# Altium PCB PCB.PcbDoc
Units mm, origin at the board's own origin, x right, y up, seen from the top; angles counter-clockwise.
Board outline 32.5 x 63 mm, 4 copper layers (Top Layer, Layer 1, Layer 2, Bottom Layer), stack 0.603 mm thick; 13 components, 20 nets, 68 pads, 176 vias.
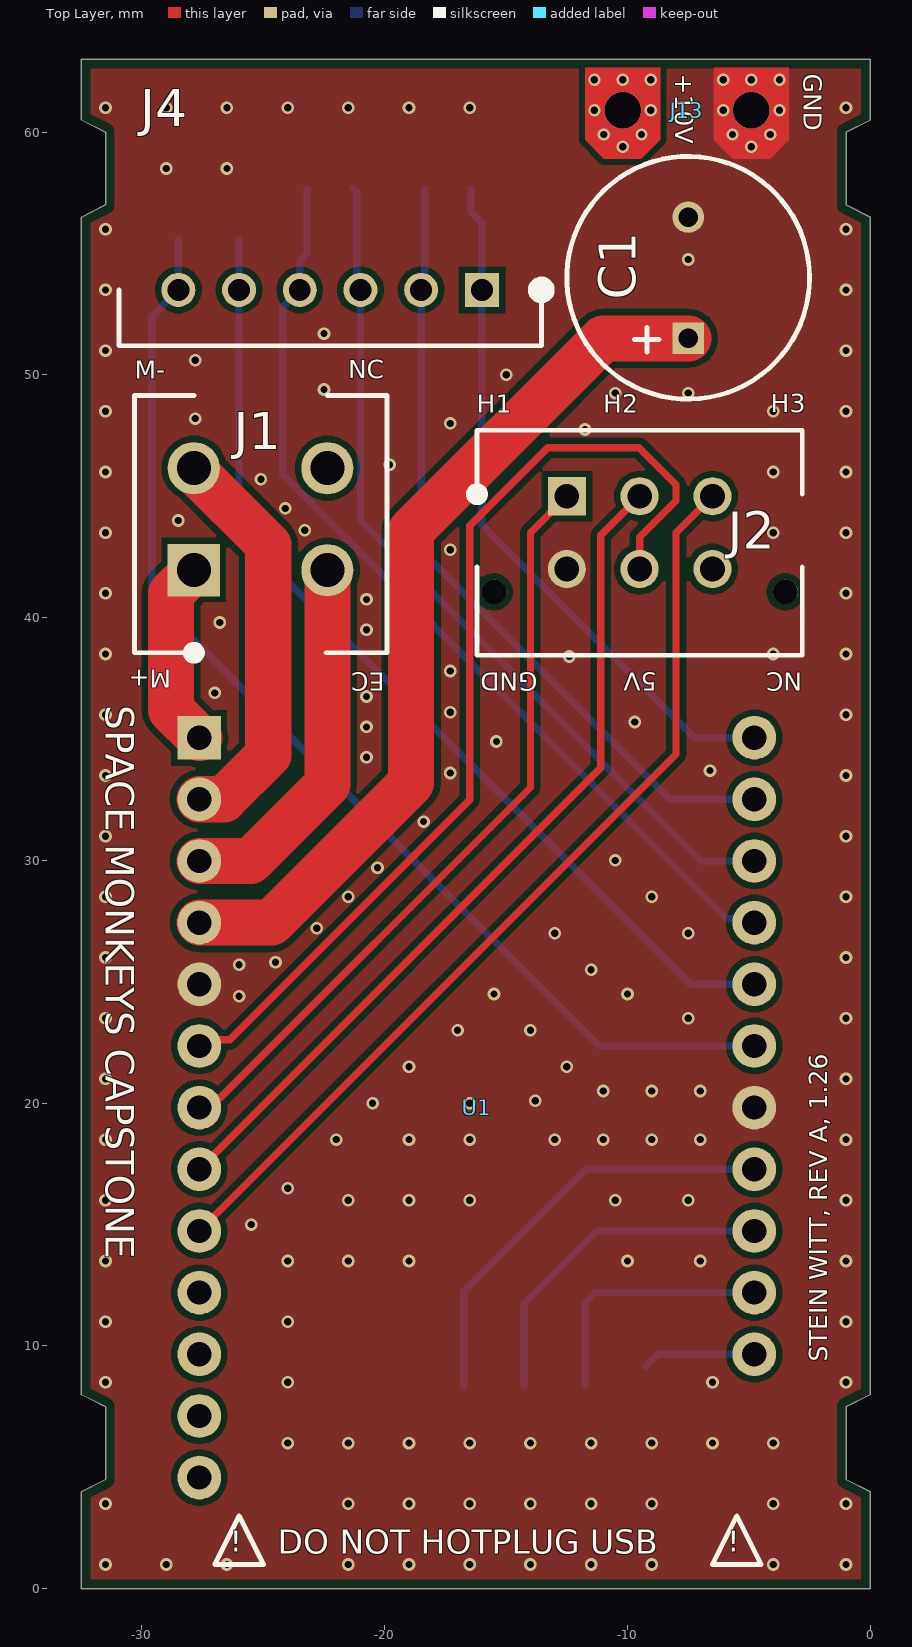
[diagram p0: Top Layer view]
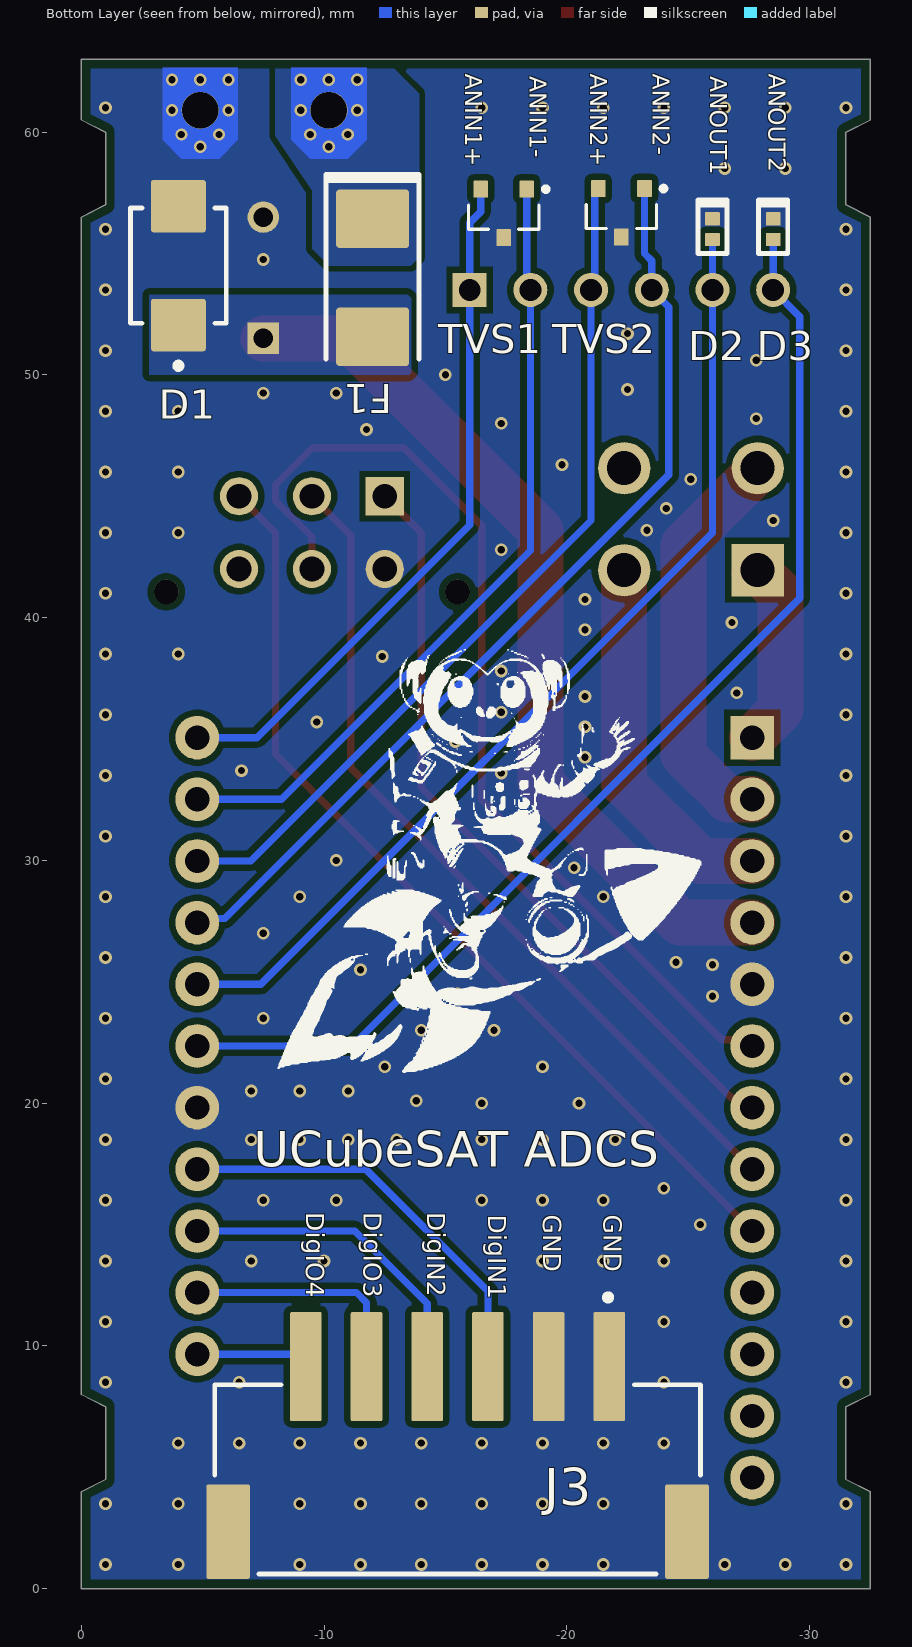
[diagram p1: Bottom Layer view, seen from below]
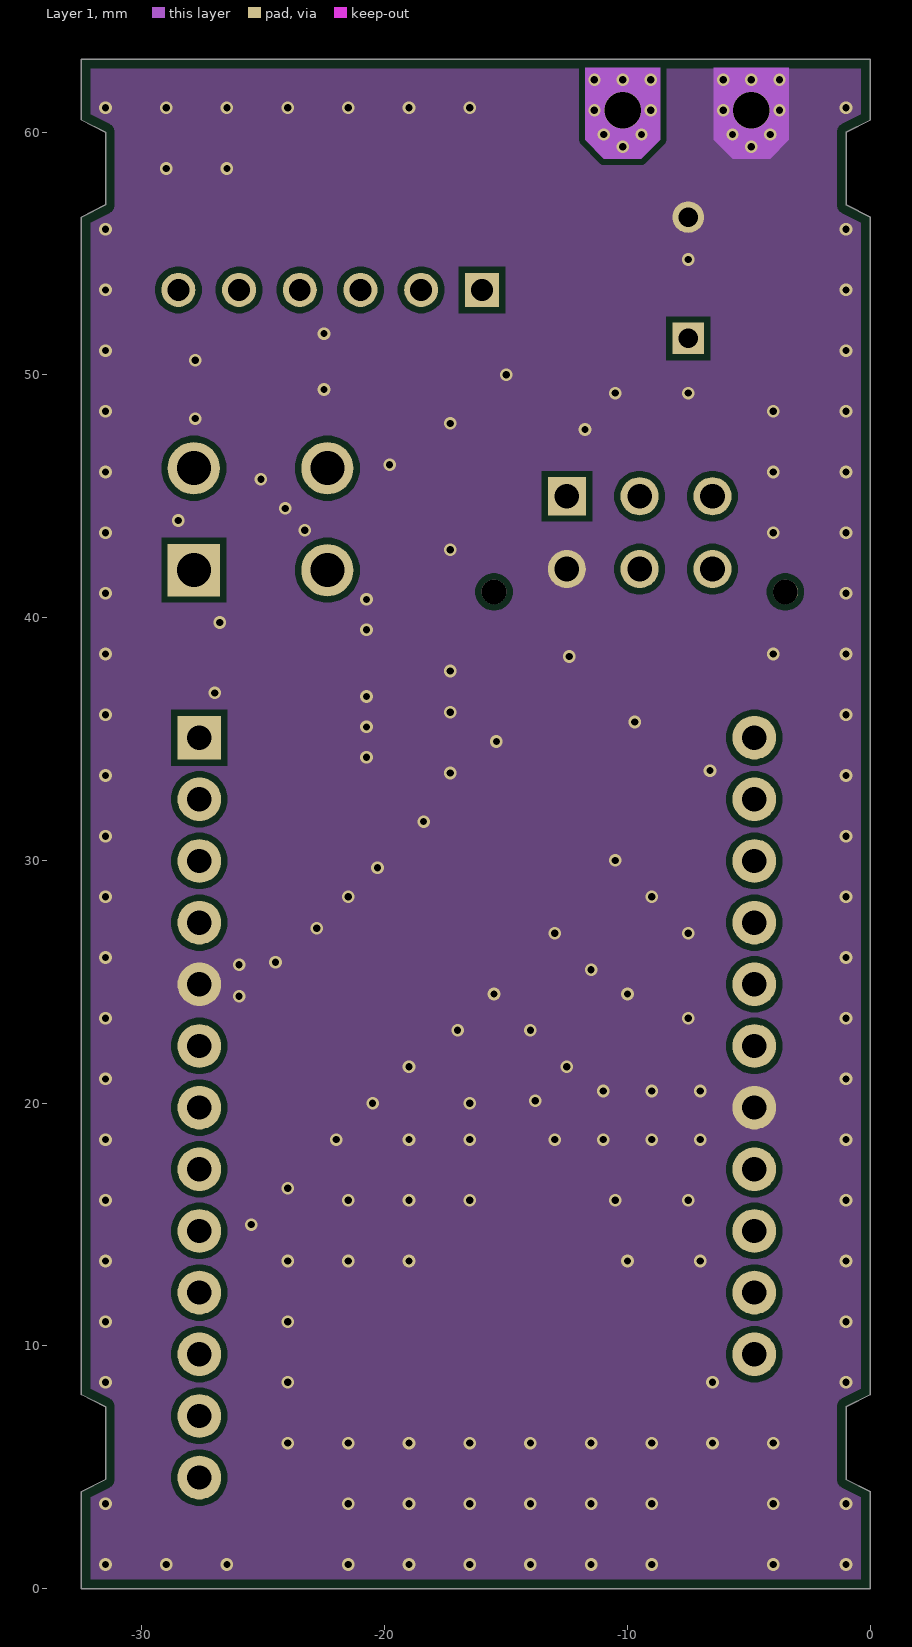
[diagram p2: Layer 1]
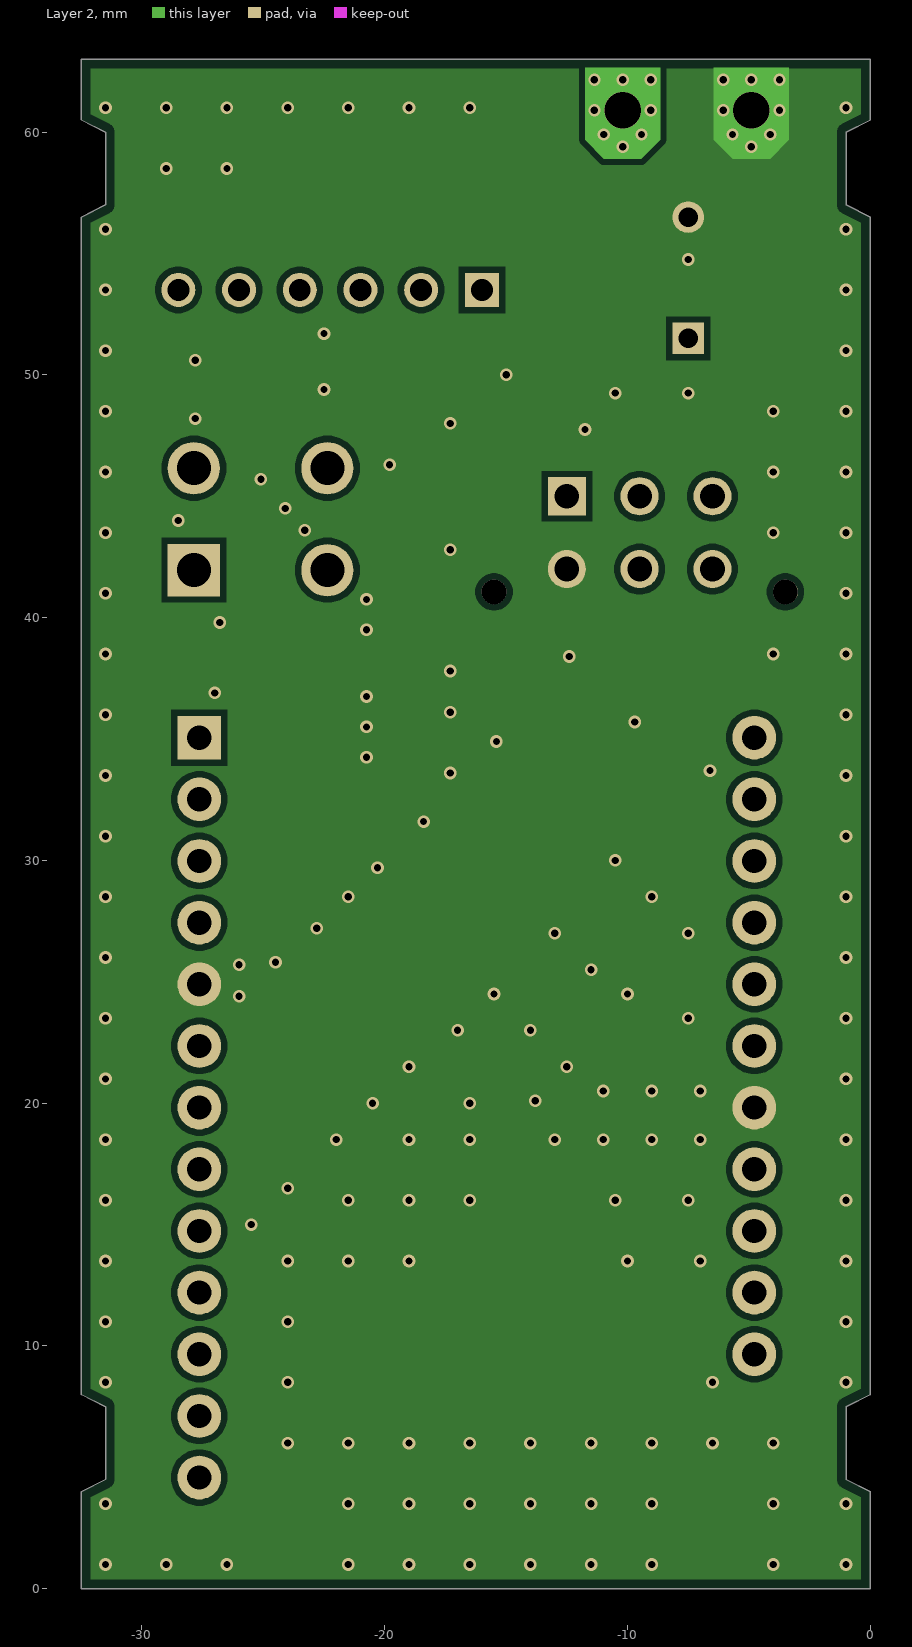
[diagram p3: Layer 2]
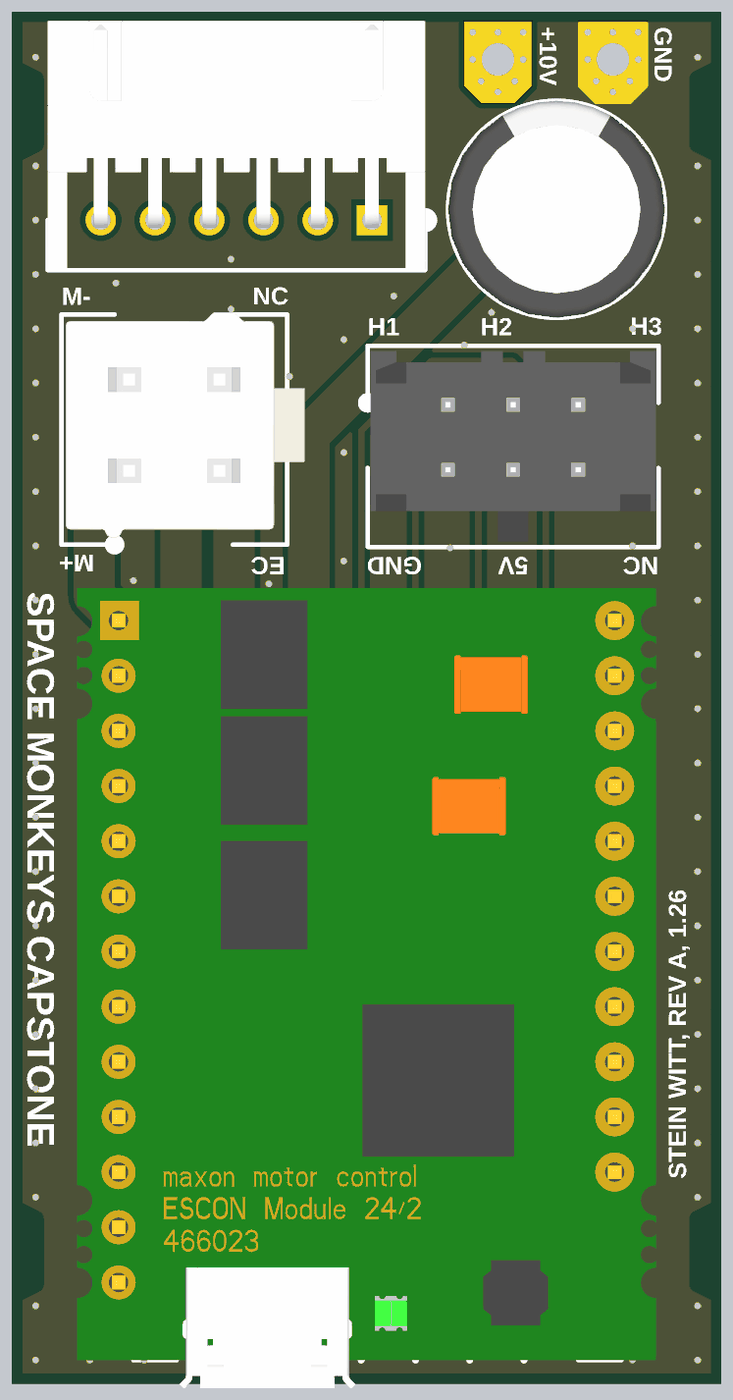
[diagram p4: 3D render of the assembled board from above, using the file's embedded part models]
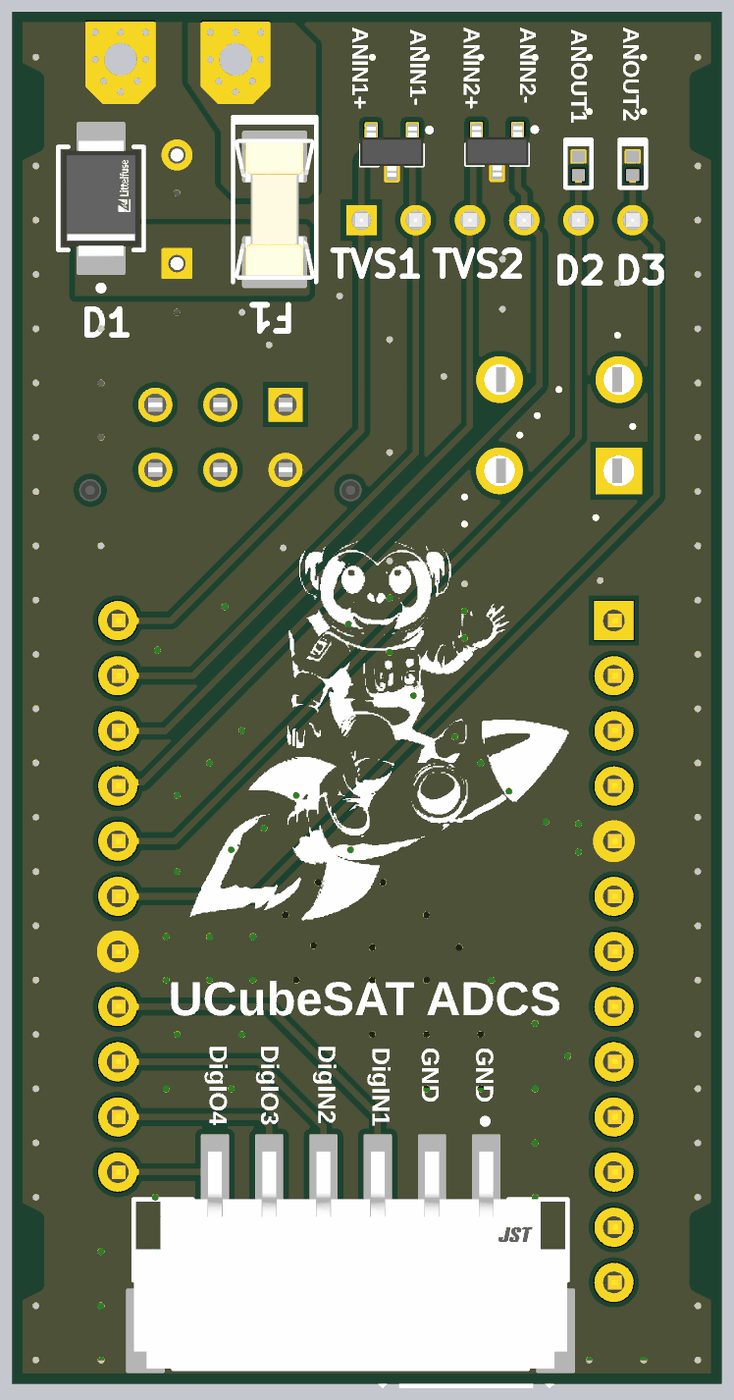
[diagram p5: 3D render of the assembled board from below, using the file's embedded part models]

## Layer stack, top to bottom
Top Solder: solder mask 0.0102, Solder Resist, Dk 3.5
Top Layer: signal copper 0.0356
Dielectric 2: prepreg 0.0711, PP-006, Dk 4.1
Layer 1: signal copper 0.035
Dielectric 1: dielectric 0.32, FR-4, Dk 4.8
Layer 2: signal copper 0.035
Dielectric 3: prepreg 0.0711, PP-006, Dk 4.1
Bottom Layer: signal copper 0.0356
Bottom Solder: solder mask 0.0102, Solder Resist, Dk 3.5

## Board outline
-32.5,0 -32.5,4 -31.5,4.5 -31.5,7.5 -32.5,8 -32.5,56.5 -31.5,57 -31.5,60 -32.5,60.5 -32.5,63 0,63 0,60.5 -1,60 -1,57 0,56.5 0,8 -1,7.5 -1,4.5 0,4 0,0

## Design rules (kind name [scope] priority, off if disabled: settings)
BoardOutlineClearance [All] p1: gap=0.381 ignorepadtopadclearanceinfootprint=FALSE
Clearance "Clearance Polygons" [InPolygon] p1: gap=0.254 ignorepadtopadclearanceinfootprint=FALSE
Clearance [All] p2: gap=0.127 ignorepadtopadclearanceinfootprint=FALSE
ComponentClearance "HM-TRP & UFL" [InComponent('X1') vs InComponent('U1')] p1: gap=0 collisioncheckmode=3 verticalgap=0 showdistances=FALSE
ComponentClearance [All] p2: gap=0.025 collisioncheckmode=3 verticalgap=0.025 showdistances=FALSE
DiffPairsRouting [All] p1: maxlimit=10 minlimit=0.127 mostfreqgap=0.203 toplayer_minwidth=0.127 toplayer_maxwidth=0.381 toplayer_prefwidth=0.203 midlayer1_minwidth=0.127 midlayer1_maxwidth=0.381 midlayer1_prefwidth=0.203 midlayer2_minwidth=0.127 midlayer2_maxwidth=0.381 midlayer2_prefwidth=0.203 bottomlayer_minwidth=0.127 bottomlayer_maxwidth=0.381 bottomlayer_prefwidth=0.203 maxuncoupledlength=12.7
HoleSize [All] p1: absolutevalues=TRUE maxlimit=6.731 minlimit=0.254 maxpercent=80.000 minpercent=20.000
HoleToHoleClearance [All] p1: gap=0.254 allowstackedmicrovias=FALSE
MinimumAnnularRing [All] p1: minimumring=0.102
MinimumSolderMaskSliver [All] p1: minsoldermaskwidth=0
PlaneClearance [All] p1: clearance=0.254
PlaneConnect [All] p1: planeconnectstyle=Relief reliefexpansion=0.102 reliefentries=4 reliefconductorwidth=0.152 reliefairgap=0.152
PolygonConnect "Via connect style" [isVia] p1: connectstyle=Direct reliefconductorwidth=0.254 reliefentries=4 polygonreliefangle="90 Angle" airgapwidth=0.254
PolygonConnect [All] p2: connectstyle=Direct reliefconductorwidth=0.254 reliefentries=4 polygonreliefangle="90 Angle" airgapwidth=0.152
RoutingCorners [All] p1: cornerstyle=45-Degree minsetback=1.25 maxsetback=1.25
RoutingVias [All] p1: holewidth=0.305 width=0.559 viastyle="Through Hole" minholewidth=0.254 minwidth=0.457 maxholewidth=2.54 maxwidth=2.896
SilkToSilkClearance [All] p1: silktosilkclearance=0
SilkToSolderMaskClearance [IsPad] p1: minsilkscreentomaskgap=0.127 clearancetoexposedcopper=TRUE
SolderMaskExpansion [All] p1: expansion=0.064 istentingtop=FALSE
SupplyNets "Schematic Supply Nets_4" [InNet('+10V')] p1: voltage=0.000
SupplyNets "Schematic Supply Nets_3" [InNet('GND')] p2: voltage=0.000
SupplyNets "Schematic Supply Nets" [InNet('+VCC_M1')] p3: voltage=0.000
Width GND [InNet('GND')] p1: maxlimit=0.762 minlimit=0.254 preferedwidth=0.508
Width Power [InNetClass('Power')] p2: maxlimit=1.016 minlimit=0.508 preferedwidth=0.762
Width 3V3 [InNetClass('3V3')] p3: maxlimit=0.762 minlimit=0.254 preferedwidth=0.508
Width [All] p4: maxlimit=10.16 minlimit=0.152 preferedwidth=0.203
20 further rules are at their usual default settings.

## Components (designator, comment, footprint, x,y, rotation, side; value= is the part's Value field where it differs from the comment)
C1 "EEU-FR1J121" CAP_THT_RAD_5MM -7.5,51.5 r90 top
D1 "SMBJ33A" "DO-214AA, SMB" -4,54.5 r90 bottom
D2 "CDDFN2-T3.3B" D_0402 -26,56 r270 bottom
D3 "CDDFN2-T3.3B" D_0402 -28.5,56 r270 bottom
F1 "0157004.DR" NANO2 -12,54 r270 bottom
J1 "0039281043" "4.20MM DUAL ROW 4 CIRCUIT CONN" -25.313,44.054 r90 top
J2 "0430450627" "3.00MM DUAL ROW 6 CIRCUIT CONN" -9.5,43.085 r180 top
J3 "S6B-XH-SM4-TB(LF)(SN)" S6B-XH-SM4-TB -15.5,4.5 r180 bottom locked
J4 "S6B-XH-A (LF)(SN)" JST-XH-6PIN_RA -22.25,56.95 r0 top
J13 "POWER_CONN" POWER -10.2,60.9 r0 top
TVS1 "PESD1CAN,215" SOT23 -17.4,56.65 r270 bottom
TVS2 "PESD1CAN,215" SOT23 -22.25,56.673 r270 bottom
U1 "ESCON24.2" ESCON24.2 -4.775,9.658 r90 top

## Footprints (in the part's own frame and the unit in brackets; to place one, negate y for a bottom-side part, rotate by r counter-clockwise, add the part's x,y. Pads: shape width x height; smd on the part's side, far side on the other; paste and mask are expansions set on the pad)
"3.00MM DUAL ROW 6 CIRCUIT CONN" [mm]
  rect 1.57x1.57 hole 1.02 paste-2539.97 mask+0: 1(3,-1.915)
  round 1.57 hole 1.02 paste-2539.97 mask+0: 2(0,-1.915) 3(-3,-1.915) 4(3,1.085) 5(0,1.085) 6(-3,1.085)
  round 1.02 hole 1.02 unplated paste-2539.97 mask+0: ""(-6,2.025) ""(6,2.025)
  silkscreen extent -6.7,-4.63 6.9,4.63, body extent -6.8,-4.73 6.8,4.73, height 0.25
"4.20MM DUAL ROW 4 CIRCUIT CONN" [mm]
  rect 2.15x2.15 hole 1.4 paste-2539.97 mask+0: 1(-2.1,2.55)
  round 2.15 hole 1.4 paste-2539.97 mask+0: 2(2.1,2.55) 3(-2.1,-2.95) 4(2.1,-2.95)
  silkscreen extent -5.7,-5.4 5.1,5, body extent -5.6,-6.5 5.8,5.1, height 0.25
CAP_THT_RAD_5MM [mm]
  rect 1.3x1.3 hole 0.8: 1(0,0)
  round 1.3 hole 0.8: 2(5,0)
  silkscreen extent -2.5,-5 7.5,5, body extent -2.49,-4.99 7.5,4.99, height 16.01
D_0402 [mm] "DFN, 2-Leads, Body 0.60x1.00mm, Pitch 0.65mm, IPC Medium Density"
  rrect10% 0.55x0.6 smd mask+0.07: 1(-0.425,0) 2(0.425,0)
  silkscreen extent -1.2,-0.6 1,0.6, body extent -0.5,-0.3 0.5,0.3, height 0.45
"DO-214AA, SMB" [mm]
  rrect10% 2.16x2.26 smd paste+0 mask+0: 1(-2.45,0) 2(2.45,0)
  silkscreen extent -4.25,-1.97 2.37,1.97, body extent -2.7,-1.81 2.7,1.81, height 2.61
ESCON24.2 [mm]
  rect 1.8x1.8 hole 1: 1(25.4,22.86)
  round 1.8 hole 1: 2(22.86,22.86) 3(20.32,22.86) 4(17.78,22.86) 5(15.24,22.86) 6(12.7,22.86) 7(10.16,22.86) 8(7.62,22.86) 9(5.08,22.86) 10(2.54,22.86) 11(0,22.86) 12(-2.54,22.86) 13(-5.08,22.86) 14(0,0) 15(2.54,0) 16(5.08,0) 17(7.62,0) 18(10.16,0) 19(12.7,0) 20(15.24,0) 21(17.78,0) 22(20.32,0) 23(22.86,0) 24(25.4,0)
  body extent -9.99,-1.86 26.9,24.81, height 7.01
JST-XH-6PIN_RA [mm]
  rect 1.4x1.4 hole 0.9 paste-2539.97 mask+0: 1(6.25,-3.45)
  round 1.4 hole 0.9 paste-2539.97 mask+0: 2(3.75,-3.45) 3(1.25,-3.45) 4(-1.25,-3.45) 5(-3.75,-3.45) 6(-6.25,-3.45)
  silkscreen extent -8.7,-5.75 9,-3.15, body extent -8.8,-5.85 8.8,5.85, height 0.25
NANO2 [mm]
  rrect10% 2.4x3 smd paste+0 mask+0: 1(-2.43,0) 2(2.43,0)
  silkscreen extent -4.25,-1.92 3.35,1.91, body extent -3.25,-1.85 3.25,1.85, height 4.03
POWER [mm]
  round 1.525 hole 1.5 paste-2539.97: 1(0,0) 2(5.3,0)
  Top Layer region: 3.75,-1.225 4.525,-2 6.075,-2 6.85,-1.225 6.85,1.75 3.75,1.75
  Top Layer region: -1.55,-1.225 -0.775,-2 0.775,-2 1.55,-1.225 1.55,1.75 -1.55,1.75
  Layer 1 region: 3.75,-1.225 4.525,-2 6.075,-2 6.85,-1.225 6.85,1.75 3.75,1.75
  Layer 1 region: -1.55,-1.225 -0.775,-2 0.775,-2 1.55,-1.225 1.55,1.75 -1.55,1.75
  Layer 2 region: 3.75,-1.225 4.525,-2 6.075,-2 6.85,-1.225 6.85,1.75 3.75,1.75
  Layer 2 region: -1.55,-1.225 -0.775,-2 0.775,-2 1.55,-1.225 1.55,1.75 -1.55,1.75
  Bottom Layer region: 3.75,-1.225 4.525,-2 6.075,-2 6.85,-1.225 6.85,1.75 3.75,1.75
  Bottom Layer region: -1.55,-1.225 -0.775,-2 0.775,-2 1.55,-1.225 1.55,1.75 -1.55,1.75
S6B-XH-SM4-TB [mm]
  rrect10% 1.3x4.5 smd paste+0 mask+0: 1(6.25,4.65) 2(3.75,4.65) 3(1.25,4.65) 4(-1.25,4.65) 5(-3.75,4.65) 6(-6.25,4.65)
  rrect10% 1.8x3.9 smd paste+0 mask+0: 7(-9.45,-2.15) 8(9.45,-2.15)
  silkscreen extent -10,-3.9 10,7.62, body extent -9.97,-3.9 9.97,6.1, height 6
SOT23 [mm]
  rrect10% 0.7x0.6 smd paste-0.05: 1(-1,0.95) 2(-1,-0.95) 3(1,0)
  silkscreen extent -1.1,-1.45 0.65,1.83, body extent -1.15,-1.45 1.15,1.45, height 1.1

## Part data
C1: "CAP, ELEC, 120 µF 63 V Aluminum Electrolytic Capacitors Radial, Can 8000 Hrs @ 105°C"
D1: "TVS DIODE 33V 53.3V DO214AA", Breakdown Voltage=36.7V, Clamping Voltage=53.3V, Manufacturer="Littelfuse Inc", Max Junction Temp=+150°C, Package=SMBJ, Peak Pulse Current=11.3A, Peak Pulse Power=600W, Reverse Standoff Voltage=33V, Temperature="-65°C to +150°C", Temperature Range Low=-65°C, Automotive=No, Category=Diode, ComponentLink2Description=Datasheet, ComponentLink2URL=https://www.littelfuse.com/~/media/electronics/datasheets/tvs_diodes/littelfuse_tvs_diode_smbj_datasheet.pdf.pdf, Device Class L1="Circuit Protection", Device Class L2="TVS Diodes", Device Class L3=unset, Digikey Description="TVS DIODE 33V 53.3V DO214AA", Direction=Unidirectional, Height=2.61mm, Lead Free=Yes, Manufacturer Part Number=SMBJ33A, Mouser Description="TVS DIODE 33V 53.3V DO214AA", Number Of Channels=1, Octopart=https://octopart.com/smbj33a-littelfuse-350829, RoHS=TRUE, Temperature Range High=+150°C
D2 D3: "8V Clamp 5A (8/20Âµs) Ipp Tvs Diode Surface Mount 2-DFN (1x0.6)", Package="XDFN-2 Bourns", Availability=Good, Check_prices=https://www.snapeda.com/parts/CDDFN2-T3.3B/Bourns/view-part/510185/?ref=eda, MF=Bourns, MP=CDDFN2-T3.3B, Price=None, Purchase-URL=https://pricing.snapeda.com/search/part/CDDFN2-T3.3B/?ref=eda, SnapEDA_Link=https://www.snapeda.com/parts/CDDFN2-T3.3B/Bourns/view-part/510185/?ref=snap
F1: "FUSE, 4 A 125 V 125 V Fuse Board Mount (Cartridge Style Excluded) Requires Holder, Surface Mount 2-SMD, Square End Block with Clip", Case/Package=SMD/SMT, Current Rating=4A, DC Cold Resistance=16.3mR, Max Operating Temperature=125°C, Min Operating Temperature=-55°C, Package Quantity=1500, Voltage Rating (AC)=125V, Approvals=cULus, Depth=3.7mm, Fuse Current=4A, Fuse Type="Board Mount (Cartridge Style Excluded)", Height=0.154inch, Housing Material=Ceramic, Lead Free="Lead Free", Length=6.5mm, Mount="Surface Mount", Packaging="Tape and Reel", REACH SVHC="No SVHC", Voltage Rating (DC)=125V, Width=0.146inch
J1: "Molex Connector Header Through Hole 4 position 0.165\" (4.20mm)"
J2: "Molex Connector Header Through Hole 6 position 0.118\" (3.00mm)"
J3: library part S6B-XH-SM4-TB, "CONN HEADER SMD R/A 6POS 2.5MM", Color=Natural, Contact Resistance=20mR, Flammability Rating="UL94 V-0", Housing Color=Beige, Max Current Rating=3A, Max Operating Temperature=85°C, Max Voltage Rating (AC)=250V, Min Operating Temperature=-25°C, Package Quantity=1, Connector Type=Header, Contact Finish - Mating=TIN, Contact Material="Copper Alloy", Contact Plating=Copper, Contact Shape=Square, Contact Type="Male Pin", Depth=7mm, Fastening Type=Detent, Gender=Male, Housing Material=Polyamide, Insulation Color=Natural, Insulation Material=Nylon, Lead Free="Lead Free", Length=20mm, Mount="Surface Mount", Number of Contacts=6, Number of Positions=6, Number of Rows=1, Orientation="Right Angle", Packaging="Tape and Reel", Pitch=2.5mm, REACH SVHC="No SVHC", Series=XH, Termination=Solder, Voltage Rating=250V
J4: "CONN HEADER THT R/A 6POS 2.5MM", Color=Natural, Contact Resistance=20mR, Current Rating=3A, Flammability Rating="UL94 V-0", Housing Color=White, Insulation Resistance=1GR, Max Operating Temperature=85°C, Max Voltage Rating (AC)=250V, Min Operating Temperature=-25°C, Package Quantity=500, Connector Type=Header, Contact Finish - Mating=TIN, Contact Material=Brass, Contact Plating=Tin, Contact Shape=Square, Contact Type="Male Pin", Depth=11.5mm, Fastening Type=Detent, Gender=Male, Housing Material=Polyamide, Insulation Color=Natural, Insulation Material=Nylon, Lead Free="Lead Free", Lead Pitch=2.5mm, Length=17.4mm, Max Current Rating=3A, Mount="Through Hole", Number of Contacts=6, Number of Positions=6, Number of Rows=1, Orientation="Right Angle", Packaging=Bulk, Pitch=2.5mm, REACH SVHC="No SVHC", Series=XH, Termination=Solder, Voltage Rating=250V, Voltage Rating (AC)=250V, Wire/Cable Gauge=22AWG
J13: library part Power_CONN_NO_BOM
TVS1 TVS2: "70V Clamp 3A (8/20Âµs) Ipp Tvs Diode Surface Mount TO-236AB", Package="SC-59 Nexperia USA", Check_prices=https://www.snapeda.com/parts/PESD1CAN,215/Nexperia/view-part/?ref=eda, MF="Nexperia USA Inc.", MP=PESD1CAN,215, SnapEDA_Link=https://www.snapeda.com/parts/PESD1CAN,215/Nexperia/view-part/?ref=snap
U1: "ESCON24.2 Motor Controller Module"

## Via types
v1: diameter 0.52, hole 0.3, Top Layer to Bottom Layer, tented both sides, 160 vias
v2: diameter 0.508, hole 0.305, Top Layer to Bottom Layer, 16 vias

## Nets (pads, with @x,y where several pads share a name; then routed paths per layer and width w, separated by ;. In a path a pad name is that pad's centre, name@x,y a point inside that pad or via, vN(x,y) a via of type N, cw(c..) or ccw(c..) an arc to the next point about the centre after c; other vN are vias at no path point)
+10V: F1.1 J13.1
  other v2: -10.2,59.4 -10.975,59.9 -9.425,59.9 -11.362,60.9 -9.038,60.9 -11.362,62.15 -10.2,62.15 -9.038,62.15
+VCC_M1: C1.1 D1.1 F1.2 U1.4 | length 36.3
  Top Layer w1.9: U1.4 -24.662,27.438 -18.913,33.187 -18.913,43.587 -11,51.5 C1.1
  Bottom Layer w0.3: C1.1@-7.57,51.57 C1.1
GND: C1.2 D1.2 D2.1 D3.1 J2.4 J3.1 J3.2 J3.7 J3.8 J13.2 TVS1.3 TVS2.3 U1.5 U1.18
  other v1: -31.5,1 -29,1 -26.5,1 -21.5,1 -19,1 -16.5,1 -14,1 -11.5,1 -9,1 -4,1 -1,1 -31.5,3.5 -21.5,3.5 -19,3.5 -16.5,3.5 -14,3.5 -11.5,3.5 -9,3.5 -4,3.5 -1,3.5 -24,6 -21.5,6 -19,6 -16.5,6 -14,6 -11.5,6 -9,6 -6.5,6 -4,6 -31.5,8.5 -24,8.5 -6.5,8.5 -1,8.5 -31.5,11 -24,11 -1,11 -31.5,13.5 -24,13.5 -21.5,13.5 -19,13.5 -10,13.5 -7,13.5 -1,13.5 -25.5,15 -31.5,16 -21.5,16 -19,16 -16.5,16 -10.5,16 -7.5,16 -1,16 -24,16.5 -31.5,18.5 -22,18.5 -19,18.5 -16.5,18.5 -13,18.5 -11,18.5 -9,18.5 -7,18.5 -1,18.5 -20.5,20 -16.5,20 -13.8,20.1 -11,20.5 -9,20.5 -7,20.5 -31.5,21 -1,21 -19,21.5 -12.5,21.5 -17,23 -14,23 -31.5,23.5 -7.5,23.5 -1,23.5 -26,24.4 -15.5,24.5 -10,24.5 -11.5,25.5 -26,25.7 -24.5,25.8 -31.5,26 -1,26 -13,27 -7.5,27 -22.8,27.2 -31.5,28.5 -21.5,28.5 -9,28.5 -1,28.5 -20.3,29.7 -10.5,30 -31.5,31 -1,31 -18.4,31.6 -31.5,33.5 -1,33.5 -17.3,33.6 -6.6,33.7 -20.75,34.25 -15.4,34.9 -20.75,35.5 -9.7,35.7 -31.5,36 -1,36 -17.3,36.1 -20.75,36.75 -27,36.9 -17.3,37.8 -12.4,38.4 -31.5,38.5 -4,38.5 -1,38.5 -20.75,39.5 -26.8,39.8 -20.75,40.75 -31.5,41 -1,41 -17.3,42.8 -31.5,43.5 -4,43.5 -1,43.5 -23.3,43.6 -28.5,44 -24.1,44.5 -25.1,45.7 -31.5,46 -4,46 -1,46 -19.8,46.3 -11.75,47.75 -17.3,48 -27.8,48.2 -31.5,48.5 -4,48.5 -1,48.5 -10.5,49.25 -7.5,49.25 -22.5,49.4 -15,50 -27.8,50.6 -31.5,51 -1,51 -22.5,51.7 -31.5,53.5 -1,53.5 -7.5,54.75 -31.5,56 -1,56 -29,58.5 -26.5,58.5 -31.5,61 -29,61 -26.5,61 -24,61 -21.5,61 -19,61 -16.5,61 -1,61
  other v2: -4.9,59.4 -5.675,59.9 -4.125,59.9 -6.062,60.9 -3.738,60.9 -6.062,62.15 -4.9,62.15 -3.738,62.15
M1+: J1.1 U1.1 | length 8.1
  Top Layer w1: U1.1@-27.635,35.035 U1.1
  Top Layer w1.9: J1.1@-27.8,42 -27.817,42 J1.1 ; J1.1@-27.738,41.829 J1.1 ; U1.1@-27.635,35.035 -28.8,36.2 -28.8,41 -27.988,41.812 -27.988,41.829 J1.1
M1-: J1.2 U1.2 | length 16.7
  Top Layer w1.9: J1.2 -27.863,46.063 -24.8,43 -24.8,34.347 -26.629,32.518 U1.2
M1_3: J1.3 U1.3 | length 15.4
  Top Layer w1.9: U1.3 -25.522,29.978 -22.363,33.137 J1.3
M1_5V_HALL: J2.5 U1.6 | length 41.2
  Top Layer w0.3: U1.6 -27.377,22.616 -26.384,22.616 -16.5,32.5 -16.5,43.785 -13.285,47 -9.526,47 -8,45.474 -8,44.818 -9.5,43.318 J2.5
M1_AnIN1+: J4.1 TVS1.2 U1.24 | length 28.9
  Bottom Layer w0.3: TVS1.2 -16.45,56.717 -16,56.267 J4.1 -16,43.819 -7.239,35.058 U1.24
M1_AnIN1-: J4.2 TVS1.1 U1.23 | length 32.9
  Bottom Layer w0.3: TVS1.1 -18.35,53.65 J4.2 -18.5,42.767 -8.251,32.518 U1.23
M1_AnIN2+: J4.3 TVS2.2 U1.22 | length 35.8
  Bottom Layer w0.3: TVS2.2 -21.15,57.523 -21.15,53.65 J4.3 -21,44 -6.978,29.978 U1.22
M1_AnIN2-: J4.4 TVS2.1 U1.21 | length 39.3
  Bottom Layer w0.3: TVS2.1 -23.2,55 -23.5,54.7 J4.4 -24.2,52.8 -24.2,45.891 -5.915,27.607 -4.943,27.607 U1.21
M1_ANOUT1: D2.2 J4.5 U1.20 | length 41
  Bottom Layer w0.3: D2.2 J4.5 -26,43.5 -7.398,24.898 U1.20
M1_ANOUT2: D3.2 J4.6 U1.19 | length 47.7
  Bottom Layer w0.3: D3.2 J4.6 -29.6,52.4 -29.6,40.8 -11.158,22.358 U1.19
M1_DigIN1: J3.3 U1.17 | length 18
  Bottom Layer w0.3: J3.3@-16.75,8.336 J3.3 -16.75,12.25 -11.722,17.278 U1.17
M1_DigIN2: J3.4 U1.16 | length 14.1
  Bottom Layer w0.3: J3.4@-14.25,8.365 -14.25,11.75 -11.262,14.738 U1.16
M1_DigIO3: J3.5 U1.15 | length 10.5
  Bottom Layer w0.3: J3.5@-11.75,8.388 -11.75,11.783 -11.335,12.198 U1.15
M1_DigIO4: J3.6 U1.14 | length 4.7
  Bottom Layer w0.3: J3.6 -9.25,9.158 -8.75,9.658 U1.14
M1_HALL1: J2.1 U1.7 | length 31.7
  Top Layer w0.3: U1.7 -27.229,19.818 -26.801,20.246 -26.754,20.246 -14,33 -14,43.5 J2.1
M1_HALL2: J2.2 U1.8 | length 35.2
  Top Layer w0.3: U1.8 -11.1,33.813 -11.1,43.4 J2.2
M1_HALL3: J2.3 U1.9 | length 39
  Top Layer w0.3: U1.9 -8,34.373 -8,43.5 J2.3
pads on no net: J1.4 J2. J2.6 U1.10 U1.11 U1.12 U1.13

## Polygon pours and split planes (outlines as drawn)
GND on Bottom Layer "GND_L04_P013" (solid, pour order 13): -32.3,62.8 -32.3,0.2 -0.2,0.2 -0.2,62.8
+VCC_M1 on Bottom Layer "+VCC_M1_L04_P002" (solid, pour order 2): -13.45,53.3 -13.6,53.15 -13.6,50.1 -13.5,50 -2.8,50 -2.8,53.3
+10V on Bottom Layer "+10V_L04_P000" (solid, remove dead copper, pour order 0): -8,59.852 -8,62.6 -12.9,62.6 -13.915,61.585 -13.915,54.85 -13.565,54.5 -10.208,54.5 -9.51,55.198 -9.51,57.577
GND on Top Layer "GND_L01_P010" (solid, pour order 10): -32.3,62.8 -32.3,0.2 -0.2,0.2 -0.2,62.8
GND on Layer 1 "GND_L02_P011" (solid, pour order 11): -32.3,62.8 -32.3,0.2 -0.2,0.2 -0.2,62.8
GND on Layer 2 "GND_L03_P012" (solid, pour order 12): -32.3,62.8 -32.3,0.2 -0.2,0.2 -0.2,62.8

## Silkscreen, mask and mechanical layers (free items; w line width, h text height)
Top Overlay:
  lines w0.2: -27,1 -26,3 -25,1 -27,1 ; -6.5,1 -5.5,3 -4.5,1 -6.5,1
  text "+10V" at -8.284,62.4 h1.3 r270
  text "GND" at -2.984,62.4 h1.3 r270
  text "M-" at -30.3,49.6 h1.3
  text "NC" at -21.5,49.614 h1.3
  text "H1" at -16.2,48.2 h1.3
  text "H2" at -11,48.2 h1.3
  text "H3" at -4.1,48.216 h1.3
  text "M+" at -28.8,38.1 h1.3 r180
  text "EC" at -20,37.986 h1.3 r180
  text "GND" at -13.7,37.984 h1.3 r180
  text "5V" at -8.8,37.984 h1.3 r180
  text "NC" at -2.8,37.986 h1.3 r180
  text "SPACE MONKEYS CAPSTONE" at -31.876,36.4 h2 r270
  text "STEIN WITT, REV A, 1.26" at -1.535,9.35 h1.3 r90
  text "!" at -25.875,1.225 h1.6
  text "!" at -5.375,1.225 h1.6
  text "DO NOT HOTPLUG USB" at -24.4,1.12 h1.7
Bottom Overlay:
  drawing of 195 lines, arcs and shapes, not listed
  text "ANOUT2" at -28.063,62.4 h1.2 r90
  text "ANIN2-" at -23.3,62.4 h1.2 r90
  text "ANIN2+" at -20.716,62.4 h1.2 r90
  text "ANIN1+" at -15.576,62.4 h1.2 r90
  text "ANOUT1" at -25.663,62.3 h1.2 r90
  text "ANIN1-" at -18.236,62.3 h1.2 r90
  text "UCubeSAT ADCS" at -7.1,16.88 h2.5
  text "DigIN2" at -14.01,15.503 h1.3 r90
  text "DigIO3" at -11.379,15.503 h1.3 r90
  text "DigIO4" at -9.01,15.503 h1.3 r90
  text "GND" at -21.281,15.403 h1.3 r90
  text "GND" at -18.781,15.403 h1.3 r90
  text "DigIN1" at -16.51,15.403 h1.3 r90
Board Shape:
  the board outline again, w0.2